# Altium PCB WIZARD_100V.PcbDoc
Units mil, origin at the board's own origin, x right, y up, seen from the top; angles counter-clockwise.
Board outline 3850 x 4000 mil, 2 copper layers (Top Layer, Bottom Layer); 79 components, 47 nets, 219 pads, 33 vias.
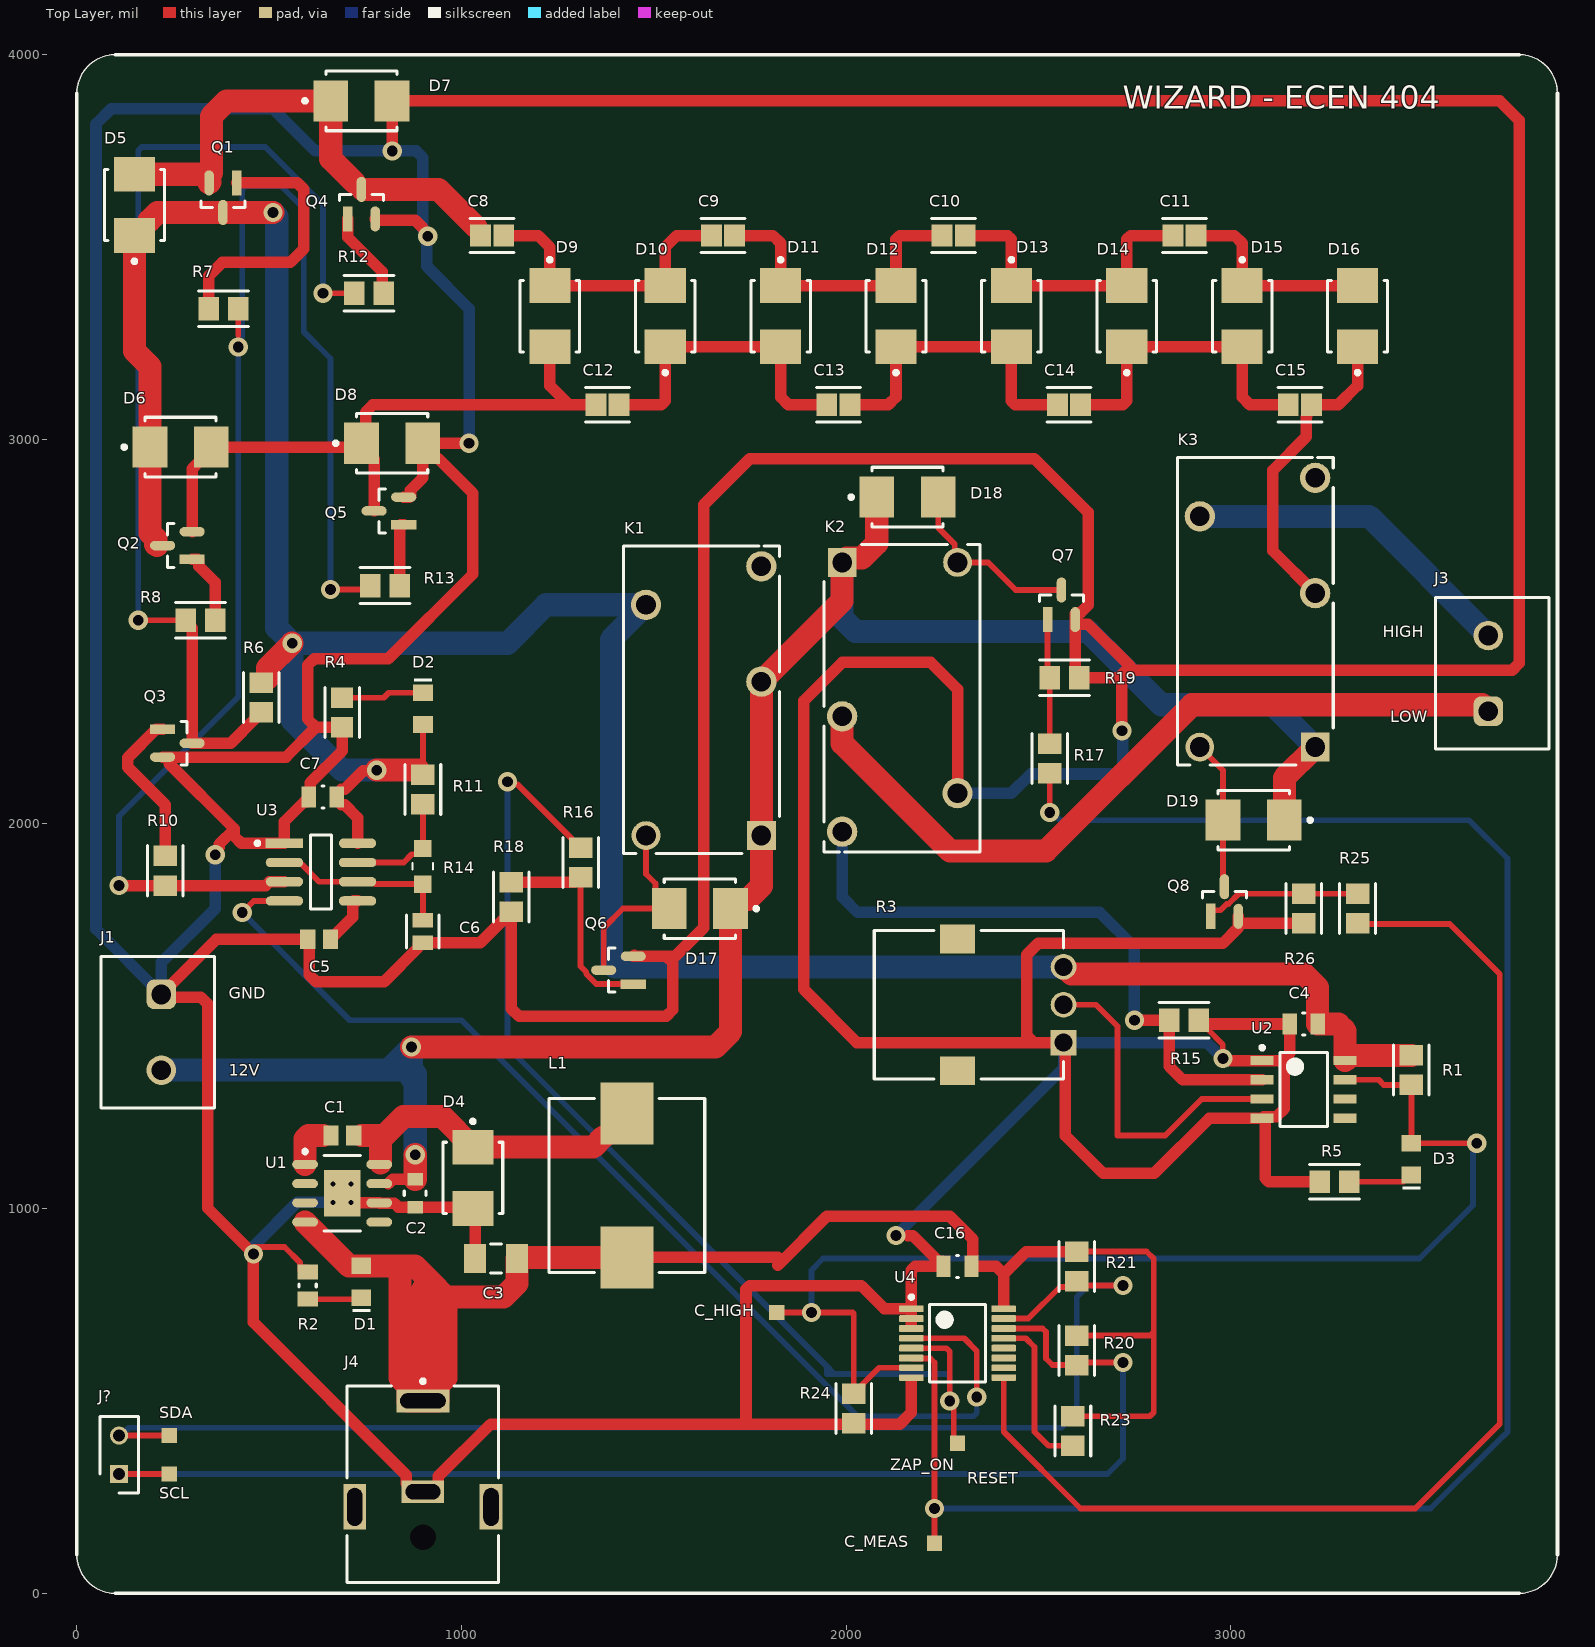
[diagram p0: Top Layer view]
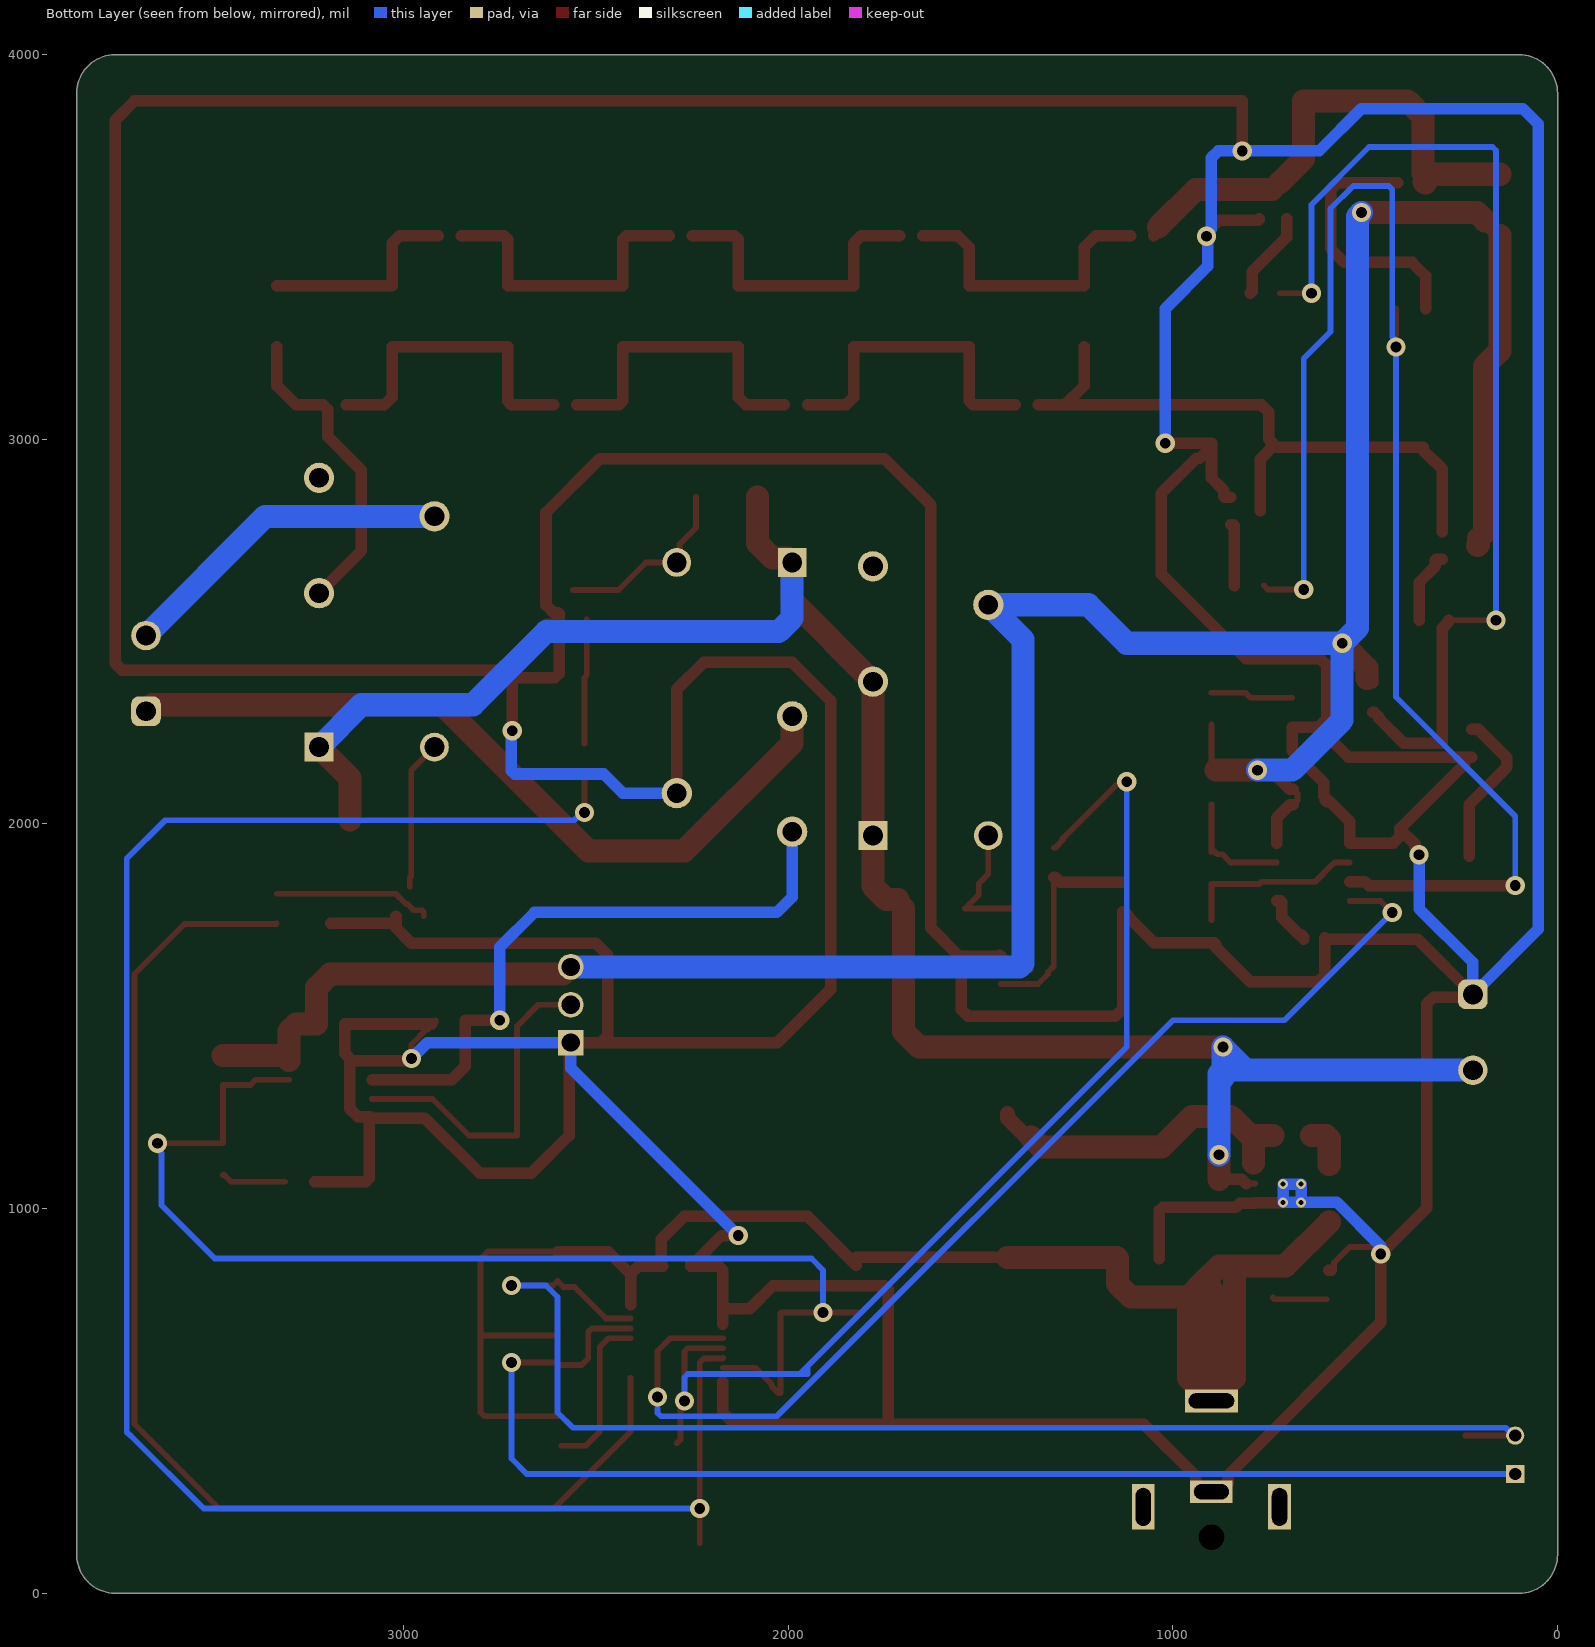
[diagram p1: Bottom Layer view, seen from below]
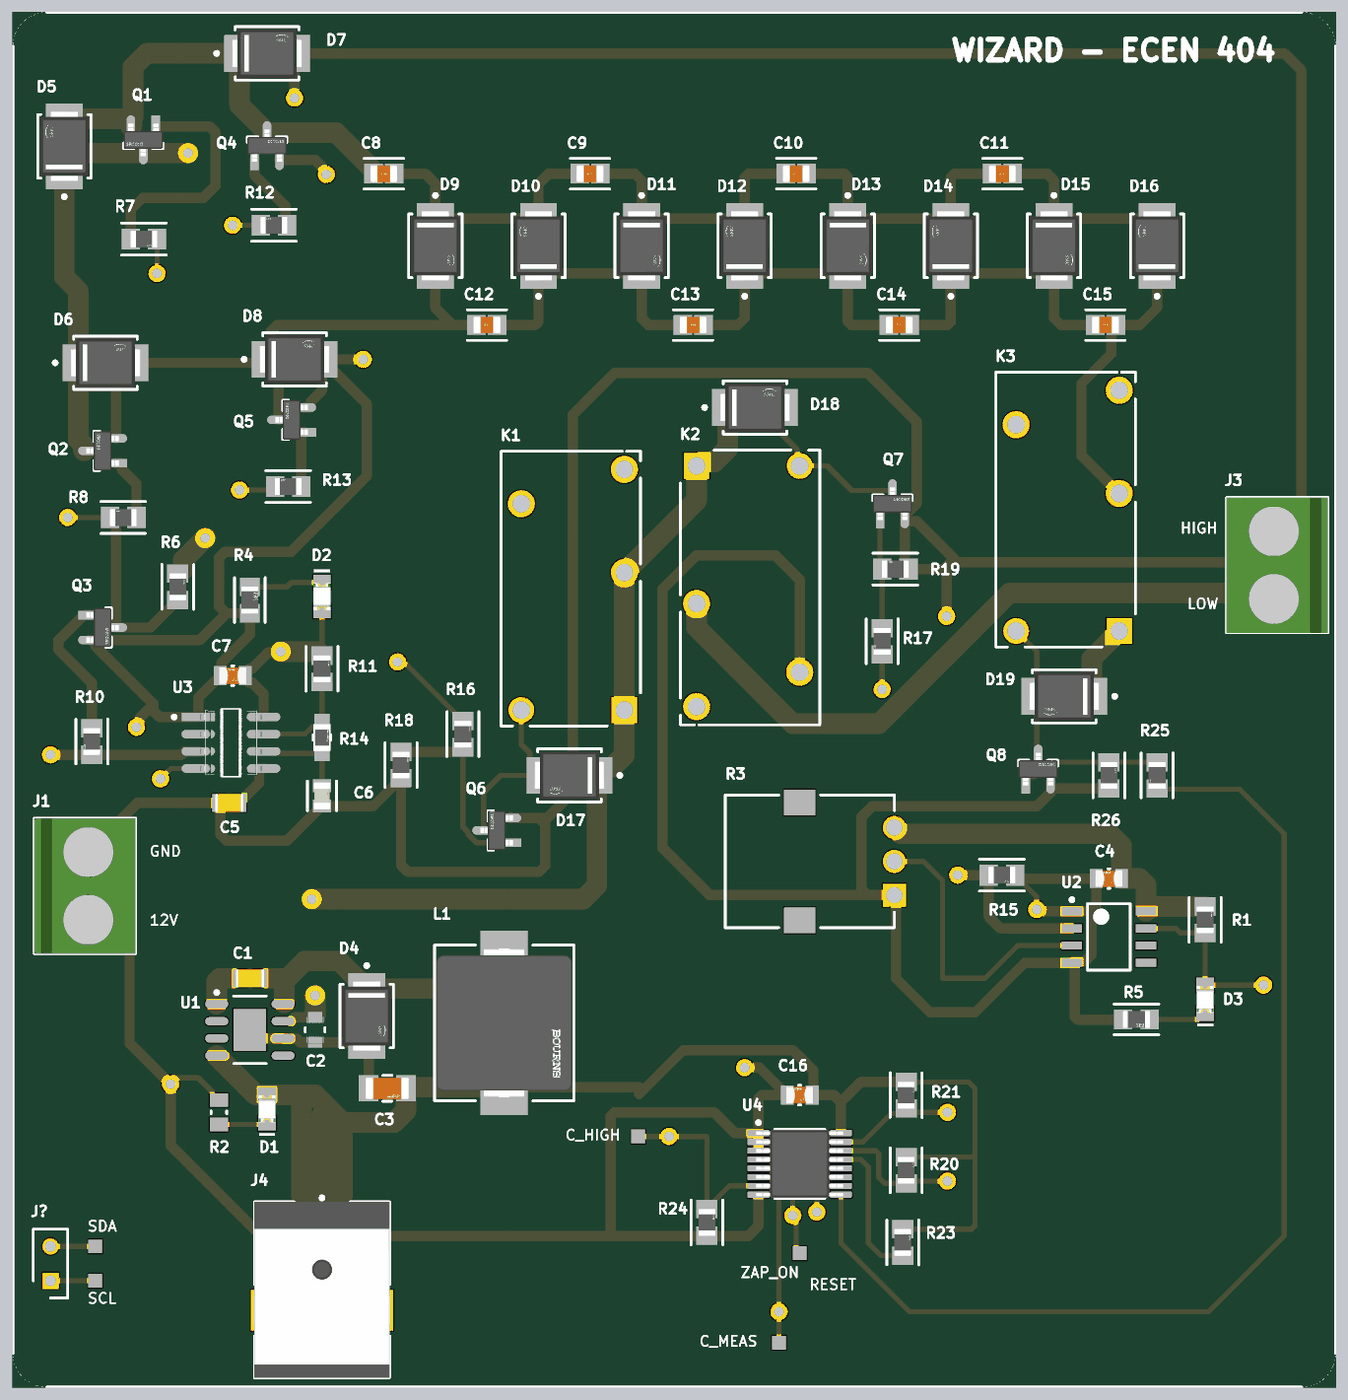
[diagram p2: 3D render of the assembled board from above, using the file's embedded part models]

## Layer stack, top to bottom
Top Solder: solder mask 0.4, Solder Resist, Dk 3.5
Top Layer: signal copper 1.4
Dielectric 1: dielectric 12.6, FR-4, Dk 4.8
Bottom Layer: signal copper 1.4
Bottom Solder: solder mask 0.4, Solder Resist, Dk 3.5

## Board outline
0,100 0,3900 cw(c100,3900) 100,4000 3750,4000 cw(c3750,3900) 3850,3900 3850,100 cw(c3750,100) 3750,0 100,0 cw(c100,100)

## Design rules (kind name [scope] priority, off if disabled: settings)
Clearance [All] p1: gap=5 ignorepadtopadclearanceinfootprint=FALSE
ComponentClearance [All] p1 off: gap=10 collisioncheckmode=3 verticalgap=10 showdistances=FALSE
DiffPairsRouting [All] p1: maxlimit=13 minlimit=13 mostfreqgap=13 toplayer_minwidth=7.42 toplayer_maxwidth=13 toplayer_prefwidth=7.42 bottomlayer_minwidth=7.42 bottomlayer_maxwidth=13 bottomlayer_prefwidth=7.42 maxuncoupledlength=500
FabricationTestPointUsage TestPointUsage [All] p1: valid=0 allowmultiple=FALSE
FabricationTestpoint Testpoint [All] p1: side=3 testpointundercomponent=TRUE minsize=40 maxsize=100 preferedsize=60 minholesize=20 maxholesize=40 preferedholesize=32 testpointgrid=1 allowsidetop=TRUE allowsidebottom=TRUE usegrid=TRUE gridtolerance=0.01
Height [All] p1 off: minheight=0 maxheight=1000 prefheight=500
HoleSize [All] p1: absolutevalues=TRUE maxlimit=800 minlimit=10 maxpercent=80.000 minpercent=20.000
MatchedLengths MatchedLengths_I210Rx [InNetClass('I210Rx')] p1: tolerance=5 checknetsindiffpair=FALSE checkdiffpairvsdiffpair=TRUE checkxsignals=TRUE checkothers=TRUE
MatchedLengths MatchedLengths_I210Tx [InNetClass('I210Tx')] p2: tolerance=5 checknetsindiffpair=FALSE checkdiffpairvsdiffpair=TRUE checkxsignals=TRUE checkothers=TRUE
MatchedLengths MatchedLengths_mSATARx [InNetClass('mSATARx')] p3: tolerance=25 checknetsindiffpair=FALSE checkdiffpairvsdiffpair=TRUE checkxsignals=TRUE checkothers=TRUE
MatchedLengths MatchedLengths_mSATATx [InNetClass('mSATATx')] p4: tolerance=25 checknetsindiffpair=FALSE checkdiffpairvsdiffpair=TRUE checkxsignals=TRUE checkothers=TRUE
MatchedLengths MatchedLengths_PCIECLK [InNetClass('PCIECLK')] p5: tolerance=25 checknetsindiffpair=FALSE checkdiffpairvsdiffpair=TRUE checkxsignals=TRUE checkothers=TRUE
MatchedLengths MatchedLengths_PCIETx [InNetClass('PCIETx')] p6: tolerance=5 checknetsindiffpair=FALSE checkdiffpairvsdiffpair=TRUE checkxsignals=TRUE checkothers=TRUE
MatchedLengths MatchedLengths_PCIERx [InNetClass('PCIERx')] p7: tolerance=5 checknetsindiffpair=FALSE checkdiffpairvsdiffpair=TRUE checkxsignals=TRUE checkothers=TRUE
MinimumSolderMaskSliver [All] p1: minsoldermaskwidth=5
PlaneConnect [All] p1: planeconnectstyle=Relief reliefexpansion=20 reliefentries=4 reliefconductorwidth=15 reliefairgap=10
PolygonConnect [All] p1: connectstyle=Direct reliefconductorwidth=20 reliefentries=4 polygonreliefangle="90 Angle" airgapwidth=30
RoutingVias [All] p1: holewidth=20 width=40 viastyle="Through Hole" minholewidth=15 minwidth=35 maxholewidth=28 maxwidth=50
SilkToSilkClearance [All] p1: silktosilkclearance=5
SilkToSolderMaskClearance SilkscreenOverComponentPads [IsPad] p1: minsilkscreentomaskgap=5 clearancetoexposedcopper=TRUE
SolderMaskExpansion [All] p1: expansion=4 istentingtop=FALSE
SupplyNets "Schematic Supply Nets_1" [InNet('+12')] p1: voltage=0.000
SupplyNets "Schematic Supply Nets" [InNet('GND')] p2: voltage=0.000
Width [All] p1: maxlimit=500 minlimit=5 preferedwidth=10
20 further rules are at their usual default settings.

## Classes and differential pairs
component class WIZARD_HV: C1 C2 C3 C4 C5 C6 C7 C8 C9 C10 C11 C12 C13 C14 C15 D1 D2 D3 D4 D5 D6 D7 D8 D9 D10 D11 D12 D13 D14 D15 D16 L1 Q1 Q2 Q3 Q4 Q5 R1 R2 R3 R4 R5 R6 R7 R8 R10 R11 R12 R13 R14 R15 U1 U2 U3
component class WIZARD_Control: C16 D17 D18 D19 J1 J3 J4 J? K1 K2 K3 Q6 Q7 Q8 R16 R17 R18 R19 R20 R21 R23 R24 R25 R26 U4

## Components (designator, comment, footprint, x,y, rotation, side; value= is the part's Value field where it differs from the comment)
C1 "CL21B103KBANNNC" CAPC2013X75X45LL10T25 690.47,1190 r180 top
C2 "CGA4J3X7R1E684K125AB" FP-CGA4J-MFG 880,1040 r270 top
C3 "GRM31CR61A107MEA8L" FP-GRM31C-0_3-e0_3_0_8-IPC_B 1090,870 r0 top
C4 "CC0805KRX7R9BB104" FP-CC0805-0_85-MFG 3190,1480 r180 top value="100 nF"
C5 "CL21B103KBANNNC" CAPC2013X75X45LL10T25 630,1700 r0 top
C6 "C0805C122K5RACTU" FP-C0805C-DN-MFG 900,1720.47 r270 top value="1,200 pF"
C7 "CC0805KRX7R9BB104" FP-CC0805-0_85-MFG 640,2070 r180 top value="100 nF"
C8 "C2012X7T2E104K125AA" FP-C2012-125-0_2-IPC_B 1079.92,3530 r0 top
C9 "C2012X7T2E104K125AA" FP-C2012-125-0_2-IPC_B 1679.92,3530 r0 top
C10 "C2012X7T2E104K125AA" FP-C2012-125-0_2-IPC_B 2279.92,3530 r0 top
C11 "C2012X7T2E104K125AA" FP-C2012-125-0_2-IPC_B 2879.92,3530 r0 top
C12 "C2012X7T2E104K125AA" FP-C2012-125-0_2-IPC_B 1379.92,3090 r0 top
C13 "C2012X7T2E104K125AA" FP-C2012-125-0_2-IPC_B 1979.92,3090 r0 top
C14 "C2012X7T2E104K125AA" FP-C2012-125-0_2-IPC_B 2579.92,3090 r0 top
C15 "C2012X7T2E104K125AA" FP-C2012-125-0_2-IPC_B 3179.92,3090 r0 top
C16 "CC0805KRX7R9BB104" FP-CC0805-0_85-MFG 2290,850 r180 top value="100 nF"
D1 "150080RS75000" WL-SMCW_0805_150080xx75000 740,810 r90 top
D2 "150080RS75000" WL-SMCW_0805_150080xx75000 900,2300 r270 top
D3 "150080RS75000" WL-SMCW_0805_150080xx75000 3470,1128.66 r90 top
D4 "SK520B" FP-SMB-MFG 1030,1080 r270 top
D5 "SK520B" FP-SMB-MFG 150,3609.72 r90 top
D6 "SK520B" FP-SMB-MFG 270,2980 r0 top
D7 "SK520B" FP-SMB-MFG 740,3880 r0 top
D8 "SK520B" FP-SMB-MFG 820,2990 r0 top
D9 "SK520B" FP-SMB-MFG 1230,3320.28 r270 top
D10 "SK520B" FP-SMB-MFG 1530,3320.28 r90 top
D11 "SK520B" FP-SMB-MFG 1830,3320.28 r270 top
D12 "SK520B" FP-SMB-MFG 2130,3320.28 r90 top
D13 "SK520B" FP-SMB-MFG 2430,3320.28 r270 top
D14 "SK520B" FP-SMB-MFG 2730,3320.28 r90 top
D15 "SK520B" FP-SMB-MFG 3030,3320.28 r270 top
D16 "SK520B" FP-SMB-MFG 3330,3320.28 r90 top
D17 "SK520B" FP-SMB-MFG 1620,1780 r180 top
D18 "SK520B" FP-SMB-MFG 2160,2850 r0 top
D19 "SK520B" FP-SMB-MFG 3060,2010 r180 top
J1 "691137710002" 691137710002 210.16,1458.43 r270 top
J3 "691137710002" 691137710002 3679.84,2391.57 r90 top
J4 "PJ-063AH" CUI-PJ-063AH_V 900,263.78 r270 top
J? "801-83-002-10-001101" RHDR2W60P0X254_1X2_508X254X700P 110,310 r270 top
K1 "G5Q-14-DC12" OMRON-G5Q-14-5_V 1630,2320 r90 top
K2 "G5Q-14-DC12" OMRON-G5Q-14-5_V 2140,2330 r270 top
K3 "G5Q-14-DC12" OMRON-G5Q-14-5_V 3070,2550 r90 top
L1 "SRP1038A-100M" FP-SRP1038A-100M-MFG 1430,1060 r270 top
Q1 "MMBT3904-7-F" FP-SOT23-IPC_A 380,3628.45 r270 top
Q2 "MMBT3904-7-F" FP-SOT23-IPC_A 261.55,2723.98 r180 top
Q3 "MMBT3904-7-F" FP-SOT23-IPC_A 261.55,2210 r0 top
Q4 "MMBT3904-7-F" FP-SOT23-IPC_A 740,3611.55 r90 top
Q5 "MMBT3904-7-F" FP-SOT23-IPC_A 811.55,2813.98 r180 top
Q6 "MMBT3904-7-F" FP-SOT23-IPC_A 1408.45,1620 r180 top
Q7 "MMBT3904-7-F" FP-SOT23-IPC_A 2560,2570 r90 top
Q8 "MMBT3904-7-F" FP-SOT23-IPC_A 2983.98,1798.45 r90 top
R1 "RR1220P-103-D" FP-RR1220-IPC_A 3470,1360 r90 top
R2 "RC0805FR-07147RL" RESC2013X60X35NL10T20 600,800 r270 top value=147R
R3 "P090S-14T20BR10K" RES-POT-3 2290,1530 r90 top
R4 "RMCF0805FT392R" FP-RMCF0805-IPC_A 690,2290 r90 top
R5 "RMCF0805FT392R" FP-RMCF0805-IPC_A 3270,1070 r0 top
R6 "RR1220P-102-D" FP-RR1220-IPC_A 480,2328.41 r90 top
R7 "RR1220P-103-D" FP-RR1220-IPC_A 381.59,3340 r0 top
R8 "RR1220P-103-D" FP-RR1220-IPC_A 321.59,2530 r180 top
R10 "RR1220P-103-D" FP-RR1220-IPC_A 230,1878.41 r270 top
R11 "RR1220P-102-D" FP-RR1220-IPC_A 900,2090 r90 top
R12 "RR1220P-103-D" FP-RR1220-IPC_A 760,3380 r180 top
R13 "RR1220P-103-D" FP-RR1220-IPC_A 801.59,2620 r180 top
R14 "ERA-6AEB4992V" FP-ERA6A_MFG 900,1890 r90 top
R15 "RR1220P-102-D" FP-RR1220-IPC_A 2878.41,1490 r0 top
R16 "RR1220P-102-D" FP-RR1220-IPC_A 1310,1900 r90 top
R17 "RR1220P-102-D" FP-RR1220-IPC_A 2530,2170 r270 top
R18 "RR1220P-103-D" FP-RR1220-IPC_A 1130,1810 r90 top
R19 "RR1220P-103-D" FP-RR1220-IPC_A 2568.41,2380 r180 top
R20 "RR1220P-103-D" FP-RR1220-IPC_A 2600,631.59 r90 top
R21 "RR1220P-103-D" FP-RR1220-IPC_A 2600,850 r90 top
R23 "RR1220P-103-D" FP-RR1220-IPC_A 2590,421.59 r90 top
R24 "RR1220P-103-D" FP-RR1220-IPC_A 2020,480 r90 top
R25 "RR1220P-102-D" FP-RR1220-IPC_A 3330,1780 r270 top
R26 "RR1220P-103-D" FP-RR1220-IPC_A 3190,1780 r90 top
U1 "LM22673MRE-5.0/NOPB" MRA08B_L 690,1040 r0 top
U2 "LM311DR2G" ONSC-SOIC-8-751-07_V 3190,1310 r0 top
U3 "NE555DR" FP-D0008A-IPC_A 634.98,1875 r0 top
U4 "TCA9554PWR" PW0016A_M 2290,650 r0 top

## Footprints (in the part's own frame and the unit in brackets; to place one, negate y for a bottom-side part, rotate by r counter-clockwise, add the part's x,y. Pads: shape width x height; smd on the part's side, far side on the other; paste and mask are expansions set on the pad)
691137710002 [mm] "Horizontal Cable Entry with Pressure Clamp, pitch 5mm, 02p"
  rrect50% 1.95x1.95 hole 1.3: 1(-2.5,0.25)
  round 1.95 hole 1.3: 2(2.5,0.25)
  silkscreen extent -5,-3.75 5,3.75, body extent -5,-3.75 5,3.75, height 11.6
CAPC2013X75X45LL10T25 [mm] "Chip Capacitor, 2-Leads, Body 2.1x1.35mm, IPC High Density"
  rect 1x1.3 smd: 1(-0.75,0) 2(0.75,0)
  body extent -1.05,-0.67 1.05,0.67, height 0.75
CUI-PJ-063AH_V [mm] "THD, 2-Leads, Body 13x10mm, Height 9mm"
  rect 1.5x3.5 hole 1 slot 3 at 90 deg: 1(-6,0)
  rect 1.5x2.8 hole 1 slot 2.3 at 90 deg: 2(0,0)
  rect 3x1.5 hole 1 slot 2.5 at 0 deg: 3(1,4.5) 4(1,-4.5)
  round 1.4 hole 1.7 unplated: 5(3,0)
  silkscreen extent -7.42,-5 6,5, body extent -7,-5.15 6,5.15, height 9
FP-C0805C-DN-MFG [mm]
  rect 0.95x1.35 smd paste+0 mask+0: 1(-0.75,0) 2(0.75,0)
  silkscreen extent -1.1,-1.07 1.1,1.07, body extent -1.4,-0.85 1.4,0.85, height 0.25
FP-C2012-125-0_2-IPC_B [mil]
  rect 54.25x57.33 smd paste+0 mask+0: 1(-30.08,0) 2(30.08,0)
  silkscreen extent -57,-44 57,44, body extent -67,-39 67,39, height 10
FP-CC0805-0_85-MFG [mm]
  rect 0.95x1.4 smd paste+0 mask+0: 1(-0.925,0) 2(0.925,0)
  silkscreen extent -0.07,-0.73 0.07,0.73, body extent -1.6,-1.05 1.6,1.05, height 0.25
FP-CGA4J-MFG [mm]
  rect 0.8x1.05 smd paste+0 mask+0: 1(-0.925,0) 2(0.925,0)
  silkscreen extent -0.15,-0.73 0.15,0.73, body extent -1.43,-0.82 1.43,0.82, height 0.25
FP-D0008A-IPC_A [mil]
  rect 97.21x24.49 smd paste+0 mask+0: 1(-95.02,75)
  rrect100% 97.21x24.49 smd paste+0 mask+0: 2(-95.02,25) 3(-95.02,-25) 4(-95.02,-75) 5(95.02,-75) 6(95.02,-25) 7(95.02,25) 8(95.02,75)
  silkscreen extent -170,-97 27,97, body extent -163,-116 163,116, height 10
FP-ERA6A_MFG [mm]
  rect 1.15x1.15 smd paste+0 mask+0: 1(-1.175,0) 2(1.175,0)
  silkscreen extent -0.23,-0.67 0.23,0.67, body extent -1.85,-0.77 1.85,0.77, height 0.25
FP-GRM31C-0_3-e0_3_0_8-IPC_B [mil]
  rect 57.22x74.97 smd paste+0 mask+0: 1(-54.15,0) 2(54.15,0)
  silkscreen extent -14,-37 14,37, body extent -93,-47 93,47, height 10
FP-RMCF0805-IPC_A [mil]
  rect 53.33x57.56 smd paste+0 mask+0: 1(-38.42,0) 2(38.42,0)
  silkscreen extent -65,-45 65,45, body extent -85,-48 85,48, height 10
FP-RR1220-IPC_A [mil]
  rect 53.34x61.27 smd paste+0 mask+0: 1(-38.41,0) 2(38.41,0)
  silkscreen extent -65,-46 65,46, body extent -85,-50 85,50, height 10
FP-SMB-MFG [mm]
  rect 2.29x2.72 smd paste+0 mask+0: 1(-2.025,0) 2(2.025,0)
  silkscreen extent -3.85,-1.97 2.35,1.97, body extent -3.27,-2.07 3.27,2.07, height 0.25
FP-SOT23-IPC_A [mm]
  rect 1.659x0.627 smd paste+0 mask+0: 1(-0.977,0.915)
  rrect100% 1.659x0.627 smd paste+0 mask+0: 2(-0.977,-0.915) 3(0.977,0)
  silkscreen extent 0.23,-1.45 0.65,1.45, body extent -2.31,-1.95 2.31,1.95, height 0.25
FP-SRP1038A-100M-MFG [mm]
  rect 4.1x3.5 smd paste+0 mask+0: 1(-4.75,0) 2(4.75,0)
  silkscreen extent -5.75,-5.15 5.75,5.15, body extent -6.9,-5.25 6.9,5.25, height 0.25
MRA08B_L [mm] "SOIC, 8-Leads, Body 4.9x3.9mm, Pitch 1.27mm, Exposed Pad, IPC High Density"
  oval 1.7x0.6 smd: 1(-2.45,1.905) 2(-2.45,0.635) 3(-2.45,-0.635) 4(-2.45,-1.905) 5(2.45,-1.905) 6(2.45,-0.635) 7(2.45,0.635) 8(2.45,1.905)
  rect 2.41x3.1 smd: 9(0,0)
  silkscreen extent -2.57,-2.5 1.2,2.88, body extent -2,-2.5 2,2.5, height 1.68
OMRON-G5Q-14-5_V [mm] "Relay, 5-Leads, Body 20.3x10.3mm"
  rect 1.9x1.9 hole 1.3: 1(-8.89,-3.81)
  round 2 hole 1.3: 2(1.27,-3.81) 3(8.89,-3.81) 4(6.35,3.81)
  round 1.9 hole 1.3: 5(-8.89,3.81)
  silkscreen extent -10.07,-5 10.23,5.3, body extent -10.07,-5 10.23,5.3, height 16.2
ONSC-SOIC-8-751-07_V [mm] "SOIC, 8-Leads, Body 4.9x3.9mm, Pitch 1.27mm"
  rect 1.52x0.6 smd: 1(-2.74,1.905) 2(-2.74,0.635) 3(-2.74,-0.635) 4(-2.74,-1.905) 5(2.74,-1.905) 6(2.74,-0.635) 7(2.74,0.635) 8(2.74,1.905)
  silkscreen extent -2.86,-2.45 1.58,2.88, body extent -1.95,-2.45 1.95,2.45, height 1.75
PW0016A_M [mm] "SOP, 16-Leads, Body 5.1x4.5mm, Pitch 0.65mm, IPC Low Density"
  rrect22% 1.6x0.45 smd: 1(-3.05,2.275) 2(-3.05,1.625) 3(-3.05,0.975) 4(-3.05,0.325) 5(-3.05,-0.325) 6(-3.05,-0.975) 7(-3.05,-1.625) 8(-3.05,-2.275) 9(3.05,-2.275) 10(3.05,-1.625) 11(3.05,-0.975) 12(3.05,-0.325) 13(3.05,0.325) 14(3.05,0.975) 15(3.05,1.625) 16(3.05,2.275)
  silkscreen extent -3.17,-2.55 1.85,3.17, body extent -3.21,-2.5 3.21,2.5, height 1
RES-POT-3 [mm] "POT, 3-Leads, Body 9.8x12.5mm, Pitch 2.5mm"
  rect 1.7x1.7 hole 1.2: 1(-2.5,-7)
  round 1.7 hole 1.2: 2(0,-7) 3(2.5,-7)
  rect 1.9x2.3 smd: MP1(-4.35,0) MP2(4.35,0)
  silkscreen extent -4.9,-7 4.9,5.5, body extent -4.9,-7 4.9,5.5, height 26.8
RESC2013X60X35NL10T20 [mm] "Chip Resistor, 2-Leads, Body 2.00x1.25mm, IPC Medium Density"
  rect 1x1.35 smd: 1(-0.9,0) 2(0.9,0)
  silkscreen extent -0.1,-0.58 0.1,0.58, body extent -1.05,-0.67 1.05,0.67, height 0.6
RHDR2W60P0X254_1X2_508X254X700P [mm]
  rect 1.2x1.2 / inner round 1.2 / far side rect 1.2x1.2 hole 0.8: 1(0,0)
  round 1.2 hole 0.8: 2(-2.54,0)
  silkscreen extent -3.81,-1.27 1.27,1.27
WL-SMCW_0805_150080xx75000 [mm] "SMD Mono-color Chip LED, body 2.0x1.25mm"
  rect 1.1x1.3 smd: 1(-1.05,0) 2(1.05,0)
  silkscreen extent -2,-0.6 -1.8,0.6, body extent -1,-0.63 1,0.62, height 0.7

## Part data
C1 C5: library part CMP-2000-06105-1, "Multilayer Ceramic Capacitor, 10 nF, 50 V, -55 to 125 degC, 2-Pin SMD, RoHS, Tape and Reel", Capacitance=10000pF, Case Size/Dimension=0805, Dielectric=X7R, Manufacturer="Samsung Electro-Mechanics", Package Description="2-Pin Surface Mount Device, Body 2 x 1.25 mm", Rated Voltage=50V, Tolerance (%)=±10%, Datasheet URL=https://datasheet.ciiva.com/29199/455082-da-01-en-vs-kondensator-0805-29199459.pdf, Datasheet Version=11/2010, Manufacturer URL=http://www.samsungsem.com/global/index.jsp, Mounting Technology=SurfaceMount, Package Reference=0805
C2: library part CMP-08246-002437-1, "Cap Ceramic 680nF 25V X7R 10% Pad SMD 0805 +125°C Automotive T/R", Capacitance=680nF, Case Code (Imperial)=0805, Case Code (Metric)=2012, Dielectric=X7R, Max Operating Temperature=125°C, Min Operating Temperature=-55°C, Package Quantity=2000, Ratings=AEC-Q200, Tolerance=10%, Voltage Rating=25V, Case/Package=0805, Composition=Ceramic, Depth=1.25mm, Height=1.25mm, Lead Free="Lead Free", Length=2mm, Mount="Surface Mount", Packaging="Tape and Reel", REACH SVHC="No SVHC", Termination=SMD/SMT, Thickness=0.057inch, Voltage Rating (DC)=25V, Weight=0.000194oz, Width=0.049inch
C3: library part CMP-06035-033997-1, "Chip Multilayer Ceramic Capacitors for General Purpose, 1206, 100uF, X5R, 15%, 20%, 10V", Parameter 1=100uF
C4 C7 C16: library part CMP-2100-03606-3, "CAP CER 0.1UF 50V X7R 0805", Capacitance="100 nF", Manufacturer=Yageo, Package=CC0805-0.85, Temperature="-30°C to +85°C", Temperature Characteristic=X7R, Temperature Range High=+85°C, Temperature Range Low=-30°C, Tolerance=0.1, Voltage Rating="50 V", Automotive=No, Category=Cap, ComponentLink2Description=Datasheet, ComponentLink2URL=http://www.yageo.com/documents/recent/UPY-GPHC_Y5V_6.3V-to-50V_8.pdf, Device Class L1="Passive Components", Device Class L2=Capacitors, Device Class L3="Ceramic Capacitors", Digikey Description="CAP CER 0.1UF 50V X7R 0805", Footprint Url=http://www.yageo.com/exep/pages/download/literatures/UPY-C_GEN_24.pdf, Height=0.95mm, Ipc Land Pattern Name=CAPC200125X85, Lead Free=Yes, Manufacturer Part Number=CC0805KRX7R9BB104, Material=Ceramic, Mouser Description="Multilayer Ceramic Capacitors MLCC - SMD/SMT 100nF 50V X7R 10%", Octopart=https://octopart.com/cc0805krx7r9bb104-yageo-192993, RoHS=TRUE
C6: library part CMP-2007-00286-2, "CAP CER 1200PF 50V 10% X7R 0805", Capacitance="1,200 pF", Manufacturer=KEMET, Package=C0805C-DN, Temperature="-55°C to +125°C", Temperature Characteristic=X7R, Temperature Coefficient=30ppm/°C, Temperature Range High=+125°C, Temperature Range Low=-55°C, Tolerance=0.1, Voltage Rating="50 V", Automotive=No, Category=Cap, ComponentLink2Description=Datasheet, ComponentLink2URL=https://content.kemet.com/datasheets/KEM_C1003_C0G_SMD.pdf, Device Class L1="Passive Components", Device Class L2=Capacitors, Device Class L3="Ceramic Capacitors", Digikey Description="CAP CER 1200PF 50V 10% X7R 0805", Height=0.88mm, Ipc Land Pattern Name=CAPC200125X78, Lead Free=Yes, Manufacturer Part Number=C0805C122K5RACTU, Material=Ceramic, Mouser Description="Cap Ceramic 0.0012uF 50V X7R 10% SMD 0805 125C Plastic T/R", Octopart=https://octopart.com/c0805c122k5ractu-kemet-8370191, RoHS=TRUE
C8 C9 C10 C11 C12 C13 C14 C15: library part CMP-08246-006438-1, "Multilayer Ceramic Capacitors 100nF ±10% 250V X7T SMD 0805", Capacitance=100nF, Case Code (Imperial)=0805, Case Code (Metric)=2012, Dielectric=X7T, Max Operating Temperature=125°C, Min Operating Temperature=-55°C, Package Quantity=1, Tolerance=10%, Voltage Rating=250V, Case/Package=0805, Construction=Flat, Depth=1.25mm, Height=1.25mm, Lead Free="Lead Free", Length=2mm, Mount="Surface Mount", Packaging="Tape and Reel", Radiation Hardening=No, REACH SVHC="No SVHC", RoHS Compliant=Yes, Series=C, Thickness=0.057inch, Voltage Rating (DC)=250V, Width=0.049inch
D1 D2 D3: library part CMP-1426-00011-3, "LED Uni-Color Red 630nm 2-Pin Chip 0805(2012Metric) T/R", Case Code (Imperial)=0805, Case Code (Metric)=2012, Color=Red, Forward Current=100mA, Forward Voltage=2V, Max Junction Temperature (Tj)=95°C, Max Operating Temperature=85°C, Max Reverse Voltage (DC)=5V, Min Operating Temperature=-40°C, Power Dissipation=72mW, Test Current=20mA, Case/Package=0805, Dominant Wavelength=625nm, Height=700µm, Length=2mm, Lens Style="Clear, Rectangular", Luminous Intensity=150mcd, Mount="Surface Mount", Packaging="Tape and Reel", Peak Wavelength=630nm, REACH SVHC=Unknown, RoHS=Compliant, Viewing Angle=140°, Wavelength=625nm, Width=1.25mm
D4 D5 D6 D7 D8 D9 D10 D11 D12 D13 D14 D15 D16 D17 D18 D19: library part CMP-10078-124483505-1, "SK520B Diode Schottky 200V 5A Smb", Capacitance=140pF, Case/Package=SMB, Forward Current=5A, Max Forward Surge Current (Ifsm)=110A, Max Junction Temperature (Tj)=150°C, Max Repetitive Reverse Voltage (Vrrm)=200V, Min Operating Temperature=-55°C, Peak Reverse Current=200nA, Height=2.6mm, Max Operating Temperature=150°C, NexarPartId=124483505, Reverse Voltage=200V
J1 J3: library part CMP-1502-03324-2, Current Rating=16A, Max Operating Temperature=120°C, Min Operating Temperature=-30°C, Voltage Rating=300V, Contact Material="Nickel, Tin", Height=11.6mm, Lead Pitch=5mm, NexarPartId=78871135, Number of Contacts=2, Number of Pins=2, Number of Rows=1, Packaging=Box, RoHS=Non-Compliant
J4: library part CMP-2000-06898-1, "Through Hole Right Angle DC Power Jack, 8 A, 2 mm Center Pin, 2 Position, -25 to 85 degC, RoHS, Bulk", Current Rating=8A, Flammability Rating=UL94V-0, Insulation Resistance=100MOhms, Manufacturer=CUIInc., Operating Temperature Range=-25Cto+85C, Package Description="2-Pin Through Hole Device, Body 13 x 10 mm, Height 9 mm", Voltage Rating=24V, Brand=CUI, Connector Type=DCPowerJack, Contact Gender=Male, Contact Material=Copper, Contact Plating=Nickel, Datasheet URL=http://www.cui.com/product/resource/pj-063ah.pdf, Datasheet Version="Rev. 1.02, 03/2016", Factory Pack Quantity=500, Housing Material=PolybutyleneTerephthalate(PBT), Inside Contact Diameter=2mm, Manufacturer URL=http://www.cui.com/, Mounting Angle=Right, Mounting Style=KinkedPin, Mounting Technology=ThroughHole, Outside Contact Diameter=6.5mm, Package Reference=PJ-063AH, Product=Jacks, Product Category=DCPowerConnectors, RoHS=True, Termination Style=ThroughHole
J?: "2.54/5.08 mm, Straight solder tail, Mating pin  0.76 mm,  positions", Manufacturer_Name=Preci-Dip, Mouser Part Number=437-8018300210001101, Datasheet Link=https://www.precidip.com/AppHost/9696,1/Scripts/Modules/Catalog/Default.aspx?c=7&i=310&p=107&pdf=1&dsku=801-PP-NNN-10-001101, Geometry.Height=7mm, Manufacturer_Part_Number=801-83-002-10-001101, Mouser Price/Stock=https://www.mouser.co.uk/ProductDetail/Preci-dip/801-83-002-10-001101?qs=FtMuP6KVi2SapQB4HbL8Ng%3D%3D
K1 K2 K3: library part CMP-2000-06307-2, "A Miniature Power Relay with 1-Pole 10 A Switching Capacity, 12 V, 33.3 mA, -40 to 105 degC, 5-Pin THD, RoHS, Bulk", Coil Current=33.3mA, Coil Resistance=360Ohm, Coil Voltage=12V, Manufacturer="Omron Electronic Components", Package Description="5-Pin Through Hole Device, Body 20 x 10 mm", Package Reference=G5Q-14-5, PartNumber=G5Q, Power Rating=0.4W, Contact Form=SPDT, Contact Material=SilverAlloy, Current Rating=33.3mA, Datasheet URL=https://www.omron.com/ecb/products/pdf/en-g5q.pdf, Datasheet Version=03/2016, Manufacturer URL=http://www.omron.com/, Mounting Style=ThroughHole, Mounting Technology=ThroughHole, Package URL=https://www.omron.com/ecb/products/pdf/en-g5q.pdf
L1: library part CMP-07248-000083-1, "FIXED IND 10UH 7.5A 30 MOHM SMD", Case/Package=Nonstandard, Current Rating=7.5A, DC Resistance (DCR)=30mR, Inductance=10uH, Inductance Tolerance=20%, Max Operating Temperature=150°C, Min Operating Temperature=-40°C, Package Quantity=500, Ratings=AEC-Q200, Resistor Type=Wirewound, Saturation Current=12A, Self Resonant Frequency=10MHz, Test Frequency=100kHz, Core Material="Carbonyl Powder", DC Current=7.5A, Depth=10.3mm, Height=3.8mm, Height - Seated (Max)=0.157inch, Length=11mm, Max DC Current=7.5A, Military Standard=Not, Mount="Surface Mount", Packaging="Tape and Reel", Q Factor=20, REACH SVHC="No SVHC", RMS Current (Irms)=7.5A, RoHS Compliant=Yes, Shielding=Shielded, Termination=SMD/SMT, Tolerance=20%, Width=0.394inch
Q1 Q2 Q3 Q4 Q5 Q6 Q7 Q8: library part CMP-2000-04931-2, "TRANS NPN 40V 0.2A SMD SOT23-3", Case/Package=SOT-23, Collector Base Voltage (VCBO)=60V, Collector Emitter Breakdown Voltage=40V, Collector Emitter Saturation Voltage=300mV, Continuous Collector Current=200mA, Emitter Base Voltage (VEBO)=6V, Frequency=300MHz, Max Operating Temperature=150°C, Max Power Dissipation=300mW, Min Operating Temperature=-55°C, Package Quantity=3000, Power Dissipation=350mW, Collector Emitter Voltage (VCEO)=40V, Contact Plating=Tin, Element Configuration=Single, Gain Bandwidth Product=300MHz, Height=1mm, hFE Min=100, Lead Free="Lead Free", Length=3.05mm, Max Breakdown Voltage=40V, Max Collector Current=200mA, Max Frequency=300MHz, Mount="Surface Mount", Number of Elements=1, Number of Pins=3, Packaging="Tape and Reel", Polarity=NPN, Radiation Hardening=No, REACH SVHC="No SVHC", Transition Frequency=300MHz, Voltage Rating (DC)=40V, Weight=0.000282oz, Width=1.4mm
R1 R7 R8 R10 R12 R13 R18 R19 R20 R21 R23 R24 R26: library part CMP-2001-03215-2, "10kΩ ±0.5% 0.1W 1/10W Chip Resistor 0805 (2012 Metric) Thin Film", Case Code (Imperial)=0805, Case Code (Metric)=2012, Max Operating Temperature=125°C, Max Power Dissipation=100mW, Min Operating Temperature=-55°C, Package Quantity=1, Resistance=10kR, Resistance Tolerance=0.5%, Resistor Type="Thin Film", Temperature Coefficient=25ppm/°C, Voltage Rating=100V, Case/Package=0805, Depth=1.25mm, Height=0.4mm, Lead Free="Lead Free", Length=2mm, Number of Terminations=2, Packaging="Tape and Reel", Power Rating=100mW, RoHS Compliant=Yes, Series=RR, Size Code=0805, Technology="THIN FILM", Termination=SMD/SMT, Tolerance=0.5%, Voltage Rating (DC)=100V, Weight=0.000194oz, Width=1.25mm
R2: library part CMP-2001-00922-1, Manufacturer=Yageo, Part Number=RC0805FR-07147RL
R3: library part CMP-2000-06871-1, "9 mm Rotary Potentiometer, Insulated Shaft, Conductive Plastic Element, 10 KOhm, -20 to 70 degC, 3-Pin THD, RoHS, Tray", Manufacturer="BI Technologies", Package Description="POT, 3-Leads, Body 9.8 x 12.5 mm, Pitch 2.5 mm", Package Reference=POT-3, Power (Watts)=0.03W,1/32W, Power Rating=0.03W, Resistance (Ohms)=10k, Resistive Material=ConductivePlastic, Standard Package=1, Temperature Coefficient=-, Tolerance=±20%, Actuator Diameter="0.236\"(6.00mm)", Actuator Length="0.787\"(20.00mm)", Actuator Type=Knurled, Adjustment Type=TopAdjustment, Built in Switch=Detent, Bushing Thread=-, Category=Potentiometers,VariableResistors, Datasheet URL=http://www.bitechnologies.com/pdfs/p090.pdf, Datasheet Version=07/2008, Family=RotaryPotentiometers,Rheostats, Manufacturer URL=http://www.bi-technologies.net/, Mounting Technology=ThroughHole, Mounting Type=ThroughHole, Number of Gangs=1, Number of Turns=1, Online Catalog=P090Series, Other Names=987-1277P090S14T20BR10K, Package URL=http://www.bitechnologies.com/pdfs/p090.pdf, Packaging=Tray, Rotation=280°, Series=P090, Taper=Linear, Termination Style=PCBPins,BoardLocks
R4 R5: library part CMP-26527-007282-1, "392Ω ±1% 0.125W 0805 Thick Film Chip Resistor AEC-Q200 compliant", Case Code (Imperial)=0805, Case Code (Metric)=2012, Max Operating Temperature=155°C, Max Power Dissipation=125mW, Min Operating Temperature=-55°C, Resistance=392R, Resistor Type="Thick Film", Temperature Coefficient=100ppm/°C, Tolerance=1%, Case/Package=0805, Construction=Rectangular, Contact Plating=Tin, Depth=1.25mm, Features="Automotive AEC-Q200", Height=0.026inch, Lead Free="Lead Free", Length=0.079inch, Military Standard=Not, Mount="Surface Mount", Number of Terminations=2, Packaging="Tape and Reel", Power Rating=125mW, Radiation Hardening=No, RoHS Compliant=Yes, Series=RMCF, Size Code=0805, Width=0.049inch
R6 R11 R15 R16 R17 R25: library part CMP-2001-03210-2, "1kΩ ±0.5% 0.1W 1/10W Chip Resistor 0805 (2012 Metric) Thin Film", Case Code (Imperial)=0805, Case Code (Metric)=2012, Max Operating Temperature=125°C, Max Power Dissipation=100mW, Min Operating Temperature=-55°C, Package Quantity=1, Resistance=1kR, Resistance Tolerance=0.5%, Resistor Type="Thin Film", Temperature Coefficient=25ppm/°C, Voltage Rating=100V, Case/Package=0805, Depth=1.25mm, Height=0.4mm, Lead Free="Lead Free", Length=2mm, Number of Terminations=2, Packaging="Tape and Reel", Power Rating=100mW, RoHS Compliant=Yes, Series=RR, Size Code=0805, Technology="THIN FILM", Termination=SMD/SMT, Tolerance=0.5%, Voltage Rating (DC)=100V, Width=1.25mm
R14: library part CMP-2001-00839-2, "Res Thin Film 0805 49.9K Ohm 0.1% 0.125W(1/8W) +/-25ppm/ßC SMD Automotive T/R", Case Code (Imperial)=0805, Case Code (Metric)=2012, Max Operating Temperature=155°C, Max Power Dissipation=125mW, Min Operating Temperature=-55°C, Resistance=49.9kΩ, Temperature Coefficient=25ppm/°C, Tolerance=0.1%, Voltage Rating=100V, Case/Package=0805, Composition="Metal Film, Thin Film", Contact Plating=Tin, Depth=1.25mm, Features="Automotive AEC-Q200", Height=500µm, Lead Free="Lead Free", Length=2mm, Lifecycle Status=Production, Military Standard=Not, Mount="Surface Mount", Number of Pins=2, Number of Terminations=2, Packaging="Cut Tape", Power Rating=125mW, Radiation Hardening=No, REACH SVHC=Unknown, RoHS=Compliant, Schedule B="8533210045, 8533210045", Termination=SMD/SMT, Voltage Rating (DC)=100V, Weight=5.499807mg
U1: library part CMP-0069-00738-2, "3A SIMPLE SWITCHER®, Step-Down Voltage Regulator with Adjustable Soft-Start and Current Limit, 8-pin PSOP, Pb-Free", Manufacturer="National Semiconductor", PackageTopMarking=NSXYTT*L22673*5.0, PowerWise=N, Code_JEDEC=MS-012-AA, ComponentLink1Description="LM22673 Datasheet", ComponentLink1URL=http://www.national.com/ds/LM/LM22673.pdf, ComponentLink2Description="LM22673 Web Page", ComponentLink2URL=http://www.national.com/pf/LM/LM22673.html, ComponentLink3Description="MRA08B Package Page", ComponentLink3URL=http://www.national.com/packaging/folders/mra08b.html, CompType=Switcher, DatasheetVersion=Nov-2008, PackageDescription="Molded, PSOP .193 x .154 x .058in, 8 Lead, .050in Pitch, Large DAP", PackageReference=MRA08B, PackageVersion="revB, Dec-2007", PinCount=8, RevisionNote="Component URLs added", RoHS=Y
U2: library part CMP-1305-00058-1, "Single Comparator, 5 to 30 V, 0 to 70 degC, 8-Pin SOIC, Pb-Free, Tape and Reel", Manufacturer="On Semiconductor", ComponentLink1Description="Manufacturer URL", ComponentLink1URL=http://www.onsemi.com/, ComponentLink2Description=Datasheet, ComponentLink2URL=http://www.onsemi.com/pub_link/Collateral/LM211-D.PDF, ComponentLink3Description="Package Specification", ComponentLink3URL=http://www.onsemi.com/pub_link/Collateral/751-07.PDF, DatasheetVersion="Rev. 6", ICC Typ (mA)=2.4, Mounting Technology="Surface Mount", PackageDescription="8-Pin Small Outline Integrated Circuit, Body 4.9 x 3.9 mm, Pitch 1.27 mm", PackageReference=SOIC-8-751-07, PackageVersion="Rev. AK, 02/2011", Packing="Tape and Reel", PartNumber=LM311DR2G, RoHS=TRUE, VCC Max (V)=30, VCC Min (V)=5
U3: library part CMP-1685-00007-2, "IC OSC SGL TIMER 100KHZ 8-SOIC", Case/Package=SOIC, Frequency=100kHz, High Level Output Current=-200mA, Low Level Output Current=200mA, Max Operating Temperature=70°C, Max Supply Voltage=16V, Min Operating Temperature=0°C, Min Supply Voltage=4.5V, Operating Supply Current=10mA, Package Quantity=2500, Quiescent Current=15mA, Contact Plating=Gold, Height=1.58mm, Lead Free="Lead Free", Length=4.9mm, Mount="Surface Mount", Number of Pins=8, Number of Timers/Counters=1, Packaging="Tape and Reel", Radiation Hardening=No, REACH SVHC="No SVHC", Weight=0.002561oz, Width=3.91mm
U4: library part CMP-0314-00246-2, "Remote 8-Bit I2C and SMBus I/O Expander, 1.65 to 5.5 V, -40 to 85 degC, 16-pin TSSOP (PW), Green (RoHS & no Sb/Br)", 5V Tolerant I/O=Yes, Manufacturer="Texas Instruments", Max Frequency(kHz)=400, # of I/Os=8, Code_JEDEC=MO-153, ComponentLink1Description=Datasheet, ComponentLink1URL=http://www.ti.com/general/docs/lit/getliterature.tsp?genericPartNumber=TCA9554&fileType=pdf, Configuration Registers=Yes, DatasheetVersion=SCPS233, Eco-Plan="Green (RoHS & no Sb/Br)", fSCLK(Max)(MHz)=401, I2C Address=0100xxx, Interrupt Output=Yes, Low Power=Yes, Mounting Technology="Surface Mount", PackageDescription="16-Pin Plastic Thin Small Outline Package 5 x 4.4 mm Body ,0.65 mm Pitch", PackageReference=PW0016A, PackageVersion="revG, Feb-2011", PartNumber=TCA9554PWR, SubFamily="I2C IO Expander", Vcc range(V)="1.65 to 5.5", VCC(Max)(V)=5.5, VCC(Min)(V)=1.65

## Free pads (board coordinates)
  rect 40x40 smd: 2(240,310) 2(240,410) 2(1820,730) 2(2230,130) 2(2290,390)

## Via types
v1: diameter 50, hole 28, Top Layer to Bottom Layer, 29 vias
v2: diameter 25.98, hole 12.99, Top Layer to Bottom Layer, tented top, 4 vias

## Nets (pads, with @x,y where several pads share a name; then routed paths per layer and width w, separated by ;. In a path a pad name is that pad's centre, name@x,y a point inside that pad or via, vN(x,y) a via of type N, cw(c..) or ccw(c..) an arc to the next point about the centre after c; other vN are vias at no path point)
5\5\5\R\E\S\E\T\: U3.4 U4.4 | length 2893.5
  Top Layer w15: v1(430,1770) 460,1800 U3.4 ; U4.4 2307.2,662.8 2340,630 v1(2340,510)
  Bottom Layer w15: v1(430,1770) 710,1490 1000,1490 2030,460 2331.21,460 2340,468.79 2340,480
5V: C3.2 C16.1 D1.2 J4.1 L1.2 R20.2 R21.2 R23.2 U1.4 U4.16 | length 4493.2
  Top Layer w15: C3.2 C3.2@1147.14,872.99 ; C16.1 C16.1@2330,853.58 ; R23.2 2790,460 2800,470 2800,678.79 ; R20.2 2791.21,670 2800,678.79 ; R21.2 2781.59,888.41 2800,870 2800,678.79
  Top Layer w30: D1.2@739.77,851.11 D1.2 ; L1.2 1822.99,872.99 ; 1822.99,852.99 1950,980 2270,980 2330,920 C16.1@2330,853.58 ; C16.1 2390,850 2410.08,829.92 ; 2410.08,750 2410.08,829.92 ; R21.2 2468.57,888.41 2410.08,829.92
  Top Layer w60: U1.4 707.43,851.11 D1.2@739.77,851.11 ; D1.2 840,851.34 ; C3.2 1144.15,805.15 1109,770 960,770 ; C3.2@1147.14,872.99 L1.2 ; 840,851.34 840,560 861.1,538.9 861.1,500.47 861.57,500 J4.1 ; 840,851.34 878.66,851.34 919.33,810.67 ; J4.1 938.43,500 938.9,500.47 938.9,538.9 960,560 960,770 ; J4.1 900,791.34 919.33,810.67 ; 919.33,810.67 960,770
12V_IN: C4.1 C7.1 D2.2 D5.1 D6.1 K1.4 Q1.3 Q2.3 R1.2 R3.3 R6.2 R11.2 U2.8 U3.8 | length 7750.5
  Top Layer w15: C7.1@687.62,2049.94 676.42,2061.14 C7.1 676.42,2078.86 C7.1@687.62,2090.06 ; v1@778.2,2138.2 v1(780,2140) ; R11.2@888.41,2140 R11.2 D2.2
  Top Layer w30: D5.1 158.46,3530 188.54,3560.08 D5.1@188.54,3568.54 ; Q2.3@208.1,2723.98 Q2.3 ; R6.2 483.96,2366.82 R6.2@495.63,2378.49 ; C7.1@687.62,2049.94 696.48,2049.94 730,2016.42 U3.8 ; C7.1@687.62,2090.06 696.48,2090.06 744.62,2138.2 v1@778.2,2138.2
  Top Layer w60: D5.1 150,3230 190.28,3189.72 D6.1 190.28,2756.79 205.44,2741.63 205.44,2726.64 Q2.3@208.1,2723.98 ; D5.1@188.54,3568.54 210,3590 Q1.3 v1(510,3590) ; R6.2@495.63,2378.49 495.63,2405.63 v1(560,2470) ; v1(780,2140) R11.2@888.41,2140 ; R3.3 2567.47,1628.43 2585.89,1610 3191.27,1610 3226.42,1574.85 C4.1 3280,1480 3297.87,1462.13 U2.8 3311.29,1398.41 R1.2
  Bottom Layer w60: v1(510,3590) 520,3580 520,2510 v1(560,2470) ; v1(780,2140) 690,2140 560,2270 v1(560,2470) ; R3.3 1398.79,1628.43 1390,1637.21 1390,2480 K1.4 1220,2570 1120,2470 v1(560,2470)
+12: C2.1 D17.1 D18.1 D19.1 J1.2 K1.1 K1.2 K2.1 K3.1 U1.7 | length 5415.4
  Top Layer w15: U1.7 U1.7@809.79,1065 ; D17.1@1700,1779.72 D17.1 1699.72,1788.46 1714.8,1803.54 D17.1@1737.3,1826.04 ; K2.1 K2.1@2001.11,2691.11 ; D18.1@2080,2849.72 D18.1
  Top Layer w30: U1.7@809.79,1065 821.21,1076.42 C2.1
  Top Layer w60: v1(870,1420) 1660,1420 1700,1460 D17.1@1700,1779.72 ; C2.1 v1(880,1140) ; D17.1@1714.8,1803.54 1744.85,1803.54 1780,1838.69 K1.1 K1.2 1990,2580 K2.1 ; K2.1@2001.11,2691.11 2041.11,2691.11 2080,2730 D18.1@2080,2849.72 ; D19.1 3139.72,2119.72 K3.1
  Bottom Layer w15: 870,1340 870,1331.21 871.21,1330
  Bottom Layer w60: J1.2 810,1360 ; v1(880,1140) 880,1350 ; 880,1330 870,1340 870,1360 ; K2.1 1990,2535.15 2025.15,2500 2630,2500 2820,2310 3110,2310 K3.1 ; 810,1360 870,1360 ; 810,1360 v1(870,1420) 870,1360
CURRENT_HIGH: D3.2 pad.2@1820,730 R1.1 R24.2 U2.7 U4.7 | length 3153.3
  Top Layer w15: pad.2@1820,730 v1(1910,730) 2017.44,730 2020,727.44 2020,520.35 2025.91,520.35 2043.01,537.46 2043.01,543.37 2085.67,586.02 U4.7 ; U2.7 3385,1335 3398.41,1321.59 R1.1 D3.2 v1(3640,1170)
  Bottom Layer w15: v1(1910,730) 1910,840 1940,870 3491.21,870 3630,1008.79 3630,1143.71 3633.3,1147.02 3633.3,1163.3 v1(3640,1170)
CURRENT_MEASURE: pad.2@2230,130 R17.2 U4.6 | length 4949.2
  Top Layer w15: U4.6 2171.28,610.26 2199.89,610.26 2200.14,610 2220,610 2230,600 v1(2230,220) pad.2@2230,130 ; v1(2530,2030) R17.2
  Bottom Layer w15: v1(2230,220) 3520,220 3710,410 3711.21,410 3720,418.79 3720,1910 3620,2010 2556.29,2010 2536.29,2030 v1(2530,2030) v1@2523.3,2023.3
CW_OUT: C15.2 D16.1 K3.2 | length 818.2
  Top Layer w30: K3.2 3110,2710 3110,2920 3196.96,3006.96 3196.96,3058.76 3197.87,3059.67 3197.87,3077.87 C15.2 3280,3090 3330,3140 D16.1
GND: C2.2 C3.1 C4.2 C5.1 C6.2 C7.2 C16.2 D4.2 D7.2 D8.2 J1.1 J4.2 K2.4 Q3.2 Q4.2 Q5.2 Q6.2 Q7.2 Q8.2 R2.1 R3.1 R4.1 R5.1 R15.2 R18.1 R19.1 R24.1 R26.1 U1.6 U1.9 U2.1 U2.4 U3.1 U4.1 U4.2 U4.3 U4.8 | length 30404.8
  Top Layer w15: v1(459.39,882.2) v1@461.6,880 ; v1@461.6,900 540,900 580.93,859.07 580.93,847.62 588.54,840 593.11,835.43 R2.1 R2.1@595.43,840 ; v2(713.62,1016.38) U1.9@715,1015 ; U1.6 U1.6@787.27,1014.18 ; J4.2@856.77,285.81 878.79,263.78 J4.2 ; D4.2@1026.69,1003.58 D4.2 1035.85,994.42 D4.2@1041.43,1000 ; U4.1@2169.64,740 2170,739.64 U4.1 ; R19.1@2596.02,2390.8 R19.1 ; R15.2@2926.82,1480 R15.2 2916.82,1486.04 2936,1466.87 2939.96,1466.87 2979.82,1427 2979.82,1390.18 v1(2980,1390) v1@2985,1385 ; U2.4 U2.4@3086.44,1239.31 ; 3135,1385 3140,1380
  Top Layer w30: Q3.2 Q3.2@238.09,2173.98 ; v1@370,1940 370,1947.07 410,1987.07 ; R2.1@588.54,840 R2.1@595.43,840 ; U1.9@715,1015 U1.6 ; Q4.2 776.02,3572.66 778.68,3570 880,3570 899.72,3550.28 ; U1.6@787.27,1014.18 825.82,1014.18 836.42,1003.58 C2.2 D4.2@1026.69,1003.58 ; v1@820,3770 819.72,3770.28 D7.2 3700,3880 3750,3830 3750,2417.57 3732.43,2400 2728.71,2400 ; Q5.2 864.99,2850 867.65,2852.66 867.65,2867.65 899.72,2899.72 D8.2@899.72,2981.54 ; J4.2@856.77,285.81 856.77,307.01 459.39,704.39 v1(459.39,882.2) 340,1001.6 340,1532.43 322.43,1550 226.85,1550 J1.1 363.15,1700 C5.1 604.69,1704.22 604.69,1607.57 622.27,1590 799.06,1590 888.43,1679.37 888.43,1687.24 892.13,1690.94 C6.2 1049.36,1690.94 1114.37,1755.95 1114.37,1759.92 1126.04,1771.59 R18.1 1130,1520 1150,1500 1532.43,1500 1550,1517.57 1550,1638.45 1532.43,1656.02 ; J4.2 925.59,263.78 940.12,278.31 940.12,303.9 1075.87,439.65 1748.79,439.65 ; v1@1000,2990 D8.2 D8.2@899.72,2981.54 ; C3.1 D4.2@1035.85,994.42 ; Q6.2 Q6.2@1447.34,1656.02 ; Q6.2@1450,1658.68 Q6.2@1447.34,1656.02 ; 2160,930 2173.58,930 2241.02,862.56 2249.88,862.56 2253.58,858.86 C16.2 2180,850 2170,840 U4.1@2170,739.64 ; U4.1@2169.64,740 2100,740 2040,800 1750,800 1740,790 1740,448.43 1748.79,439.65 ; 2169.92,550 2169.92,469.92 2139.65,439.65 1748.79,439.65 ; 2169.92,700 U4.2 U4.1 ; K2.4 2290,2350 2220,2420 1990,2420 1890,2320 1890,1570 2028.43,1431.57 2488.43,1431.57 ; R19.1@2596.02,2390.8 Q7.2@2596.02,2522.2 ; R19.1 2708.71,2380 ; v1(2717.5,2242.5) 2717.5,2371.21 2708.71,2380 ; R15.2@2926.82,1480 C4.2 3153.58,1403.58 3135,1385 U2.1 v1@2985,1385 ; Q8.2 Q8.2@3020,1745.01 ; U2.4 2945,1235 2801.57,1091.57 2668.43,1091.57 2570,1190 2570,1427.16 R3.1 2488.43,1431.57 ; U2.4@3086.44,1239.31 3119.31,1239.31 3140,1260 3140,1380 ; U2.4@3090,1230.69 3090,1078.79 3098.79,1070 R5.1 ; R26.1 3038.41,1741.59 3037.65,1742.35 3022.66,1742.35 Q8.2@3020,1745.01 ; Q3.2@238.09,2173.98 543.98,2173.98 621.58,2251.58 ; Q3.2@238.09,2173.98 240.75,2171.32 240.75,2156.32 410,1987.07 ; 410,1987.07 410,1967.57 427.57,1950 U3.1 539.95,2006.37 591.02,2057.44 599.88,2057.44 603.58,2061.14 C7.2 607.28,2073.7 607.28,2107.28 690,2190 R4.1 621.58,2251.58 ; 621.58,2251.58 600,2273.17 600,2412.43 617.57,2430 810,2430 1030,2650 1030,2859.72 938.27,2951.46 929.8,2951.46 D8.2@899.72,2981.54 ; Q6.2@1447.34,1656.02 1532.43,1656.02 ; 1532.43,1656.02 1556.02,1656.02 1630,1730 1630,2830 1750,2950 2490,2950 2630,2810 2630,2569.43 2609.77,2549.2 2598.68,2549.2 2596.02,2546.54 Q7.2 Q7.2@2596.02,2522.2 ; 2488.43,1431.57 2470,1450 2470,1660 2500,1690 2980,1690 3020,1730 Q8.2@3020,1745.01 ; Q7.2@2596.02,2522.2 2598.68,2519.54 2629.18,2519.54 2738.71,2410 2728.71,2400 ; 2708.71,2380 2728.71,2400
  Bottom Layer w15: v1(2717.5,2242.5) v1@2720,2240
  Bottom Layer w30: v1(360,1920) 360,1780 220,1640 J1.1 50,1726.85 50,3820 90,3860 510,3860 620,3750 v1(820,3750) 882.43,3750 900,3732.43 900,3545.93 912.51,3533.42 v1(912.51,3528.01) 910,3525.5 910,3450 1020,3340 v1(1020,2990) ; v1@459.39,902.2 573.57,1016.38 v2(666.38,1016.38) ; v1(2130,930) 2565.59,1365.59 R3.1 2938.43,1431.57 v1(2980,1390) ; K2.4 2430,2080 2480,2130 2711.21,2130 2720,2138.79 v1@2720,2240 ; v2(666.38,1016.38) v2(666.38,1063.62) v2(713.62,1063.62) v2(713.62,1016.38) v2(666.38,1016.38)
HIGH_ELECTRODE: J3.2 K3.4 | length 878.4
  Bottom Layer w60: K3.4 3360,2800 J3.2
LOW_ELECTRODE: J3.1 K2.2 | length 2030.4
  Top Layer w30: J3.1@3653.15,2310 J3.1
  Top Layer w60: K2.2 1990,2210 2270,1930 2520,1930 2900,2310 J3.1@3653.15,2310
NetC1_1: C1.1 D4.1 L1.1 U1.8 | length 937.4
  Top Layer w15: U1.8 U1.8@790,1118.54 ; L1.1@1388.9,1194.09 1430,1235.2 L1.1
  Top Layer w40: L1.1@1369.29,1186.3 1381.1,1186.3 1430,1235.2 L1.1
  Top Layer w60: 740,1190 781.21,1190 790,1181.21 U1.8@790,1118.54 ; 786.46,1176.46 850,1240 949.72,1240 D4.1 1342.72,1159.72 L1.1@1369.29,1186.3
NetC1_2: C1.2 U1.1 | length 116.3
  Top Layer w60: U1.1 593.54,1181.21 602.33,1190 640,1190
NetC5_2: C5.2 U3.5 | length 138.6
  Top Layer w30: C5.2 659.53,1705.91 664.21,1710.59 670.12,1710.59 717.1,1757.57 717.1,1797.25 719.85,1800 U3.5
NetC8_2: C8.2 C9.1 D9.1 D10.2 | length 764.7
  Top Layer w30: C8.2 1200,3530 1230,3500 D9.1 D10.2 1530,3500 1560,3530 C9.1
NetC9_2: C9.2 C10.1 D11.1 D12.2 | length 782.3
  Top Layer w30: C9.2 1810,3530 1830,3510 D11.1 D12.2 2130,3520 2140,3530 C10.1
NetC10_2: C10.2 C11.1 D13.1 D14.2 | length 788.1
  Top Layer w30: C10.2 2420,3530 2430,3520 D13.1 D14.2 2730,3520 2740,3530 C11.1
NetC11_2: C11.2 D15.1 D16.2 | length 538.3
  Top Layer w30: C11.2 3010,3530 3030,3510 D15.1 D16.2
NetC12_2: C12.2 C13.1 D10.1 D11.2 | length 823.4
  Top Layer w30: C12.2 1520,3090 1530,3100 D10.1 D11.2 1830,3110 1850,3090 C13.1
NetC13_2: C13.2 C14.1 D12.1 D13.2 | length 823.4
  Top Layer w30: C13.2 2110,3090 2130,3110 D12.1 D13.2 2430,3100 2440,3090 C14.1
NetC14_2: C14.2 C15.1 D14.1 D15.2 | length 823.4
  Top Layer w30: C14.2 2720,3090 2730,3100 D14.1 D15.2 3030,3110 3050,3090 C15.1
NetD1_1: D1.1 R2.2 | length 141.7
  Top Layer w15: R2.2 735.9,764.57 D1.1
NetD2_1: D2.1 R4.2 | length 215.4
  Top Layer w15: R4.2 798.42,2328.42 811.34,2341.34 D2.1
NetD3_1: D3.1 R5.2 | length 168.8
  Top Layer w15: R5.2 3448.74,1070 3466.06,1087.32 D3.1
NetD17_2: D17.2 K1.5 Q6.3 | length 516
  Top Layer w15: Q6.3 1370,1730 1420,1780 D17.2 1504.92,1815.36 1504.92,1845.08 1480,1870 K1.5
NetD18_2: D18.2 K2.5 Q7.3 | length 490.5
  Top Layer w15: D18.2 2239.72,2770.28 2282.64,2727.36 2282.64,2687.36 K2.5 2370,2680 2441.55,2608.45 Q7.3
NetD19_2: D19.2 K3.5 Q8.3 | length 389.6
  Top Layer w15: K3.5 2980.28,2139.72 D19.2 2980.28,1863.54 2983.98,1859.84 Q8.3
NetQ1_1: Q1.1 R7.1 | length 696.6
  Top Layer w30: R7.1 343.18,3424.85 378.32,3460 554.85,3460 590,3495.15 590,3650 573.09,3666.91 Q1.1
NetQ2_1: Q2.1 R8.1 | length 191.6
  Top Layer w30: Q2.1 314.99,2687.95 317.65,2685.29 317.65,2670.3 360,2627.95 R8.1
NetQ3_1: Q3.1 R10.1 | length 417.2
  Top Layer w30: Q3.1 206.02,2246.02 132.43,2172.43 132.43,2147.57 230,2050 R10.1
NetQ4_1: Q4.1 R12.1 | length 232.2
  Top Layer w30: Q4.1 703.98,3526.02 793.73,3436.27 793.73,3384.68 R12.1
NetQ5_1: Q5.1 R13.1 | length 166.4
  Top Layer w30: R13.1 840,2775.29 842.66,2777.95 Q5.1
NetQ6_1: Q6.1 R16.1 R18.2 | length 576.2
  Top Layer w15: R16.1 1310,1630 1324.85,1615.15 1324.85,1609.71 1350.58,1583.98 Q6.1
  Top Layer w30: R18.2 1292.86,1848.41 1306.04,1861.59 R16.1
NetQ7_1: Q7.1 R17.1 R19.2 | length 325.6
  Top Layer w15: Q7.1 2523.98,2386.02 R19.2 R17.1
NetQ8_1: Q8.1 R25.1 R26.2 | length 412.6
  Top Layer w15: Q8.1 2947.95,1770.92 2952.79,1775.76 2974.01,1775.76 2990,1791.75 2994.27,1791.75 3020.92,1818.41 R26.2 R25.1
NetR3_2: R3.2 U2.3 | length 863.3
  Top Layer w15: R3.2 2650,1530 2705.59,1474.41 2705.59,1190 2830,1190 2925,1285 U2.3
NetR11_1: R11.1 R14.2 U3.7 | length 309.6
  Top Layer w15: U3.7 850,1900 871.12,1921.12 884.86,1921.12 R14.2 ; R14.2@900,1927 R14.2 ; R11.1 R14.2
NetR23_1: R23.1 U4.13 | length 424.6
  Top Layer w15: U4.13 2467.2,662.8 2490,640 2490,420 2526.82,383.18 R23.1
O\S\C\: Q3.3 R6.1 R8.2 R12.2 | length 2704.2
  Top Layer w15: v1@180,2530 R8.2 ; v1@660,3380 R12.2
  Top Layer w30: R8.2 283.18,2526.04 300,2509.21 Q3.3 400,2210 464.37,2274.37 464.37,2278.33 476.04,2290 R6.1
  Bottom Layer w15: v1(160,2530) 160,3751.21 168.79,3760 490,3760 640,3610 v1(640,3380)
OSC_OUT: R7.2 R10.2 R13.2 U3.3 | length 3740.9
  Top Layer w15: 420,3270 R7.2 ; v1(660,2610) 753.18,2610 R13.2
  Top Layer w30: v1@130,1840 R10.2 491.02,1840 501.02,1850 U3.3
  Bottom Layer w15: v1(110,1840) 110,2020 420,2330 v1(420,3240) 426.7,3246.7 426.7,3262.98 430,3266.29 430,3650 438.79,3658.79 531.21,3658.79 590,3600 590,3280 660,3210 v1(660,2610)
OUT_HIGH: C8.1 D5.2 D7.1 Q1.2 Q4.3 | length 1369
  Top Layer w30: 321.43,3689.45 326.32,3684.56 341.32,3684.56 343.98,3681.9 Q1.2 ; Q1.2@346.64,3669.57 346.64,3689.88 Q1.2@350,3693.24 ; 722.35,3667.65 Q4.3@737.34,3667.65 ; Q4.3 Q4.3@740,3652.66 ; Q4.3@742.66,3650 Q4.3@740,3652.66 ; C8.1@1037.71,3552.29 1037.71,3542.13 C8.1 ; Q4.3@737.34,3667.65 737.34,3655.32 Q4.3@740,3652.66 ; Q4.3@737.34,3667.65 740,3664.99 Q4.3@740,3652.66
  Top Layer w60: D5.2 321.43,3689.45 ; Q1.2 Q1.2@346.64,3669.57 ; Q1.2@350,3693.24 350,3840 390,3880 D7.1 660.28,3729.72 722.35,3667.65 ; Q4.3@742.66,3650 940,3650 C8.1@1037.71,3552.29
OUT_LOW: C12.1 D6.2 D8.1 D9.2 Q2.2 Q5.3 | length 1686
  Top Layer w30: Q2.2 300,2923.88 317.57,2941.46 319.65,2941.46 349.72,2971.54 D6.2 738.74,2980 D8.1@740.28,2981.54 ; Q5.3 773.09,2948.72 D8.1@740.28,2981.54 ; D9.2 1230,3140 1280,3090 ; C12.1 1280,3090 ; D8.1@740.28,2981.54 D8.1 750.97,3000.69 750.97,3070.97 770,3090 1280,3090
SCL: J?.1 pad.2@240,310 R20.1 U4.14 | length 3399.5
  Top Layer w15: J?.1 pad.2@240,310 ; U4.14 2511.21,688.39 2520,679.6 2520,610 2536.82,593.18 R20.1 2606.82,600 v1(2720,600)
  Bottom Layer w15: J?.1 2680,310 2720,350 v1(2720,600)
SDA: J?.2 pad.2@240,410 R21.1 U4.15 | length 3432.4
  Top Layer w15: J?.2 pad.2@240,410 ; U4.15 2473.98,713.98 2556.23,796.23 2584.64,796.23 R21.1 2611.59,800 v1(2720,800)
  Bottom Layer w15: J?.2 114.91,410 134.91,430 209.84,430 2560,430 2600,470 2600,770 2630,800 v1(2720,800)
SHUT_OFF: R25.2 U4.9 | length 3198.9
  Top Layer w15: U4.9 2410.08,419.92 2610,220 3480,220 3700,440 3700,1610 3570,1740 3331.59,1740 R25.2
TRI/THR: C6.1 R14.1 U3.2 U3.6 | length 477.1
  Top Layer w15: U3.2 578.88,1900 583.63,1895.25 584.75,1895.25 630,1850 U3.6 768.93,1850 775.19,1843.74 R14.1 C6.1
ZAP_LOW: K2.3 R15.1 U2.2 | length 1640.5
  Top Layer w30: v1(2750,1490) R15.1 2840,1370 2875,1335 U2.2
  Bottom Layer w30: K2.3 1990,1810 2030,1770 2660,1770 2750,1680 v1(2750,1490)
ZAP_ON: pad.2@2290,390 R16.2 U4.5 | length 2910.7
  Top Layer w15: v1(1120,2110) 1126.7,2103.3 1145.11,2103.3 1286.87,1961.55 1286.87,1957.58 1306.04,1938.41 R16.2 ; U4.5 2261.21,637.2 2270,628.42 2270,490.53 2280,480.53 2280,400 pad.2@2290,390
  Bottom Layer w15: v1(1120,2110) 1120,1420 1950,590 ; v1(2270,500) 2270,561.21 2261.21,570 1970,570 ; 1950,590 1970,570 ; 1950,590 1950,570 1970,570
pads on no net: J4.3 J4.4 J4.5 K1.3 K3.3 R3.MP1 R3.MP2 U1.2 U1.3 U1.5 U2.5 U2.6 U4.10 U4.11 U4.12

## Silkscreen, mask and mechanical layers (free items; w line width, h text height)
Top Overlay:
  the board outline again, w0.39
  text "WIZARD - ECEN 404" at 2720,3860 h60
  text "HIGH" at 3395,2485 h30
  text "LOW" at 3415,2265 h30
  text "GND" at 395,1545 h30
  text "12V" at 395,1345 h30
  text "C_HIGH" at 1605,720 h30
  text "SDA" at 215,455 h30
  text "ZAP_ON" at 2115,320 h30
  text "RESET" at 2315,285 h30
  text "SCL" at 215,245 h30
  text "C_MEAS" at 1995,120 h30